# Altium PCB AICat V1.4 双面板 板厚1.6mm.PcbDoc (part 4 of 4)
Units mm, origin at the board's own origin, x right, y up, seen from the top; angles counter-clockwise.
Board outline 152.4 x 101.6 mm, 2 copper layers (Top Layer, Bottom Layer); 106 components, 84 nets, 315 pads, 240 vias.
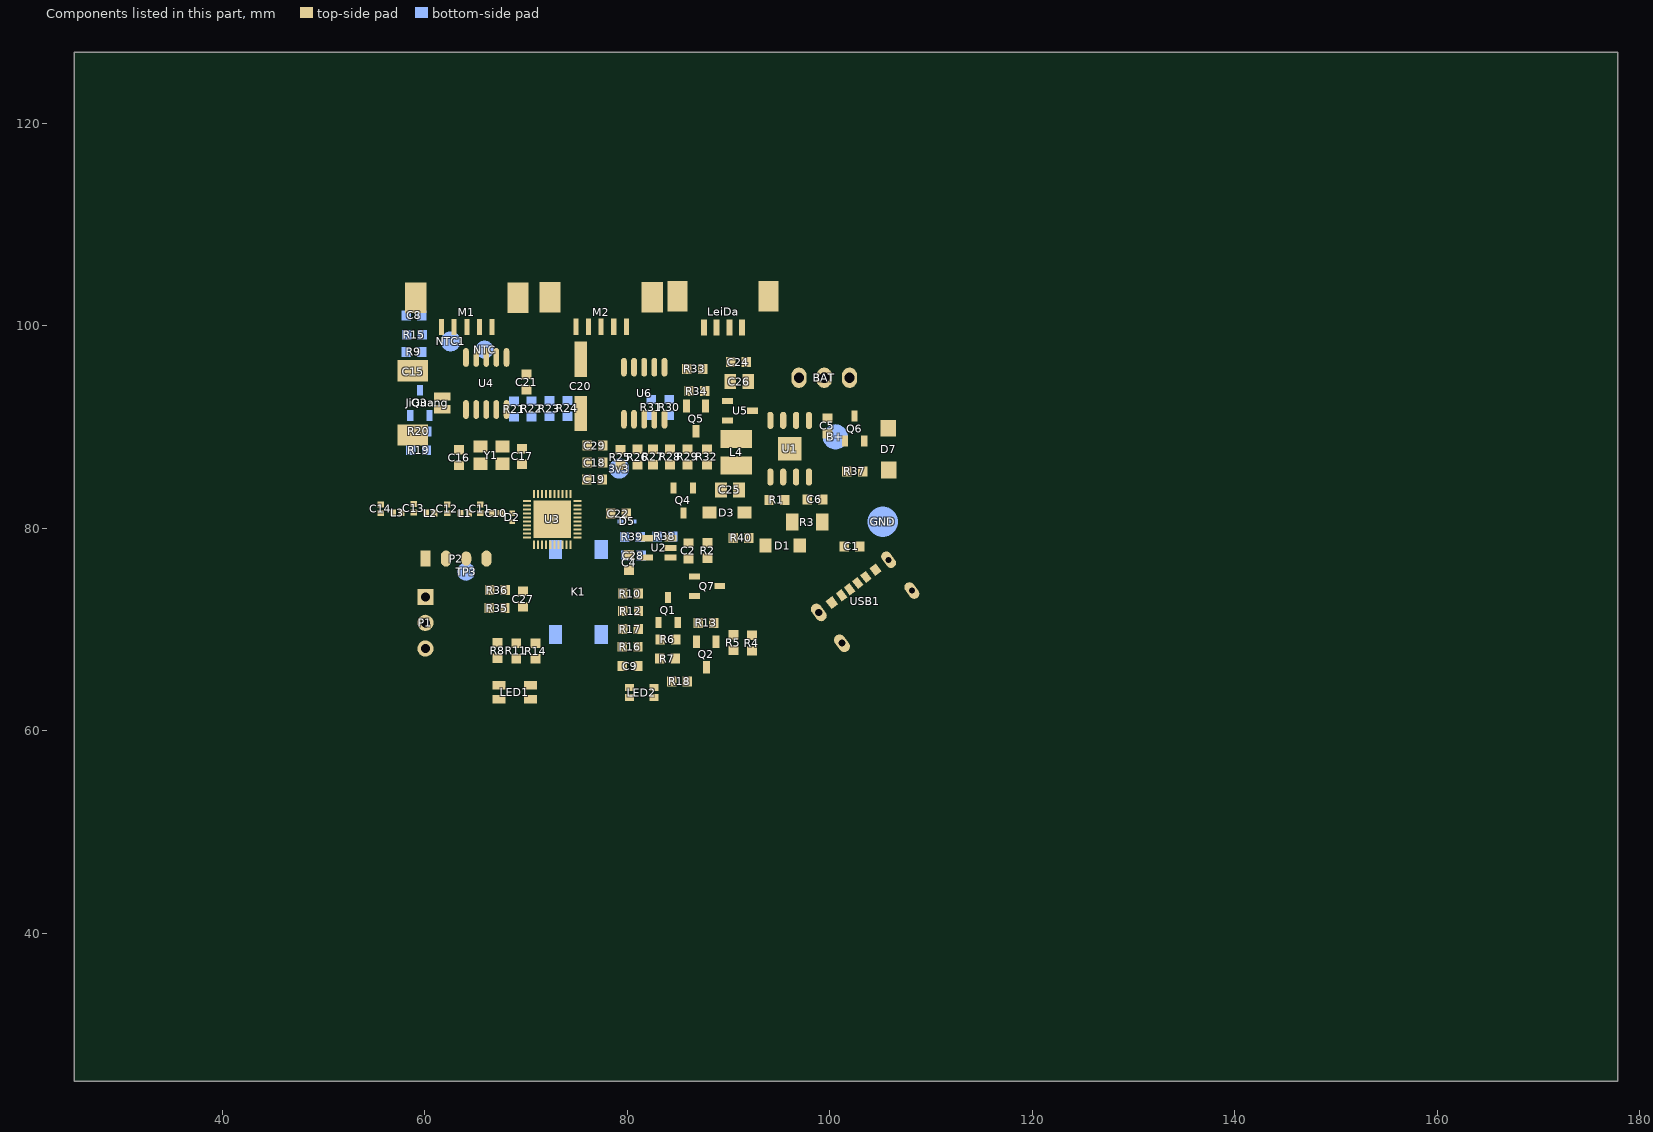
[diagram p4: the components of this part, seen from the top]

## Keep-outs
Keep-Out Layer:
  circle w0.025: c50.201,100.72 r1.35
  circle w0.025: c50.201,72.72 r1.35
  circle w0.025: c100.201,100.72 r1.35
  circle w0.025: c93.201,73.72 r1.35
  circle w0.025: c101.201,81.72 r0.8
  circle w0.025: c96.685,67.72 r0.8
  lines w0.025: 104.205,104.72 46.196,104.72 ; 109.468,76.774 109.468,73.464 104.205,69.3 cw(c82.333,99.73) 103.196,68.599 cw(c82.155,99.995) 101.325,67.423 100.779,67.108 100.372,66.88 100.009,66.682 99.691,66.514 99.421,66.373 99.148,66.234 cw(c80.806,102.479) 97.42,65.41 96.843,65.156 96.391,64.965 95.986,64.799 95.632,64.658 95.302,64.53 94.996,64.414 94.688,64.299 94.349,64.176 93.978,64.045 93.574,63.907 93.136,63.762 92.664,63.611 92.127,63.446 91.523,63.268 90.819,63.072 90.292,62.933 90.073,62.877 89.854,62.822 89.602,62.76 89.349,62.7 89.064,62.633 88.777,62.568 88.457,62.497 88.104,62.421 87.717,62.341 87.263,62.25 86.709,62.146 85.891,62.002 85.2,61.89 85.002,61.86 84.771,61.825 84.54,61.792 84.309,61.759 84.078,61.728 83.813,61.693 83.549,61.659 83.284,61.626 82.987,61.591 82.656,61.554 82.326,61.518 81.964,61.481 81.536,61.44 81.044,61.396 80.358,61.342 79.709,61.297 79.225,61.268 78.807,61.246 78.423,61.227 78.072,61.213 77.753,61.201 77.467,61.191 77.182,61.183 76.929,61.177 76.677,61.171 76.424,61.167 76.204,61.164 75.984,61.161 75.764,61.159 75.576,61.158 75.388,61.157 75.201,61.157 75.013,61.157 74.825,61.158 74.637,61.159 74.417,61.161 74.197,61.164 73.977,61.167 73.725,61.171 73.472,61.177 73.219,61.183 72.934,61.191 72.648,61.201 72.33,61.213 71.978,61.227 71.594,61.246 71.176,61.268 70.692,61.297 70.043,61.342 69.357,61.396 68.865,61.44 68.438,61.481 68.075,61.518 67.745,61.554 67.415,61.591 67.117,61.626 66.853,61.659 66.588,61.693 66.324,61.728 66.092,61.759 65.861,61.792 65.63,61.825 65.399,61.86 65.201,61.89 64.511,62.002 63.692,62.146 63.138,62.25 62.685,62.341 62.297,62.421 61.944,62.497 61.624,62.568 61.337,62.633 61.052,62.7 60.799,62.76 60.548,62.822 60.328,62.877 60.11,62.933 59.583,63.072 58.878,63.268 58.274,63.446 57.737,63.611 57.265,63.762 56.828,63.907 56.424,64.045 56.053,64.176 55.713,64.299 55.405,64.414 55.099,64.53 54.769,64.658 54.415,64.799 54.011,64.965 53.558,65.156 52.981,65.41 cw(c69.596,102.479) 51.253,66.234 50.981,66.373 50.71,66.514 50.393,66.682 50.03,66.88 49.622,67.108 49.077,67.423 cw(c68.246,99.995) 47.205,68.599 cw(c68.068,99.73) 46.196,69.3 46.196,104.72 ; 109.468,76.784 109.468,104.72 46.196,104.72

## Other copper
Top Layer:
  rectangle net VBUS_BAT: 104.724,88.875 106.883,93.37
  rectangle net GND: 77.774,80.438 78.104,80.663
  rectangle net BAT+: 96.114,93.853 97.79,95.936
  rectangle net GND: 89.662,99.035 90.449,104.292
  rectangle net GND: 56.185,94.742 62.103,96.545
  rectangle net GND: 55.096,77.546 56.159,79.811
  rectangle net NetBAT1_2: 98.628,93.777 100.254,95.961
  rectangle net GND: 93.193,86.487 100.381,89.078
  region: 48.038,79.423 48.038,78.923 55.321,78.923 55.321,79.423
  region net NetANT1_1: 55.397,81.273 55.397,81.773 48.117,81.773 48.117,81.273
  region: 48.325,84.117 47.825,84.117 47.825,78.923 48.325,78.923
  region: 51.747,83.617 51.747,84.117 47.83,84.117 47.83,83.617
  region: 51.828,86.416 51.328,86.416 51.328,83.619 51.828,83.619
  region: 51.828,85.944 51.828,86.444 47.848,86.444 47.848,85.944
  region: 48.328,88.737 47.828,88.737 47.828,85.941 48.328,85.941
  region: 51.802,88.26 51.802,88.76 47.827,88.76 47.827,88.26
  region: 51.828,91.056 51.328,91.056 51.328,88.26 51.828,88.26
  region: 51.828,90.587 51.828,91.087 47.817,91.087 47.817,90.587
  region: 48.317,93.416 47.817,93.416 47.817,90.609 48.317,90.609
  region: 48.214,85.941 48.214,86.442 47.827,86.442 47.827,85.941
  region: 53.144,92.916 53.144,93.416 47.817,93.416 47.817,92.916
  rectangle net VBUS_BAT: 60.935,98.527 62.205,102.921
  rectangle net VBUS_BAT: 67.793,95.936 75.514,100.432
  rectangle net VBUS_BAT: 83.414,95.225 84.48,99.974
  rectangle net VCC_USB: 101.015,77.159 101.498,77.826
  rectangle net VBUS_BAT: 82.042,99.416 84.455,100.584
  rectangle net GND: 101.114,93.853 102.79,95.936
  rectangle net GND: 85.141,98.298 86.741,104.419
  rectangle net GND: 85.649,103.937 100.457,104.394
Bottom Layer:
  rectangle net BAT+: 96.088,93.828 97.765,95.961
  rectangle net GND: 101.103,93.878 102.754,95.91
  rectangle net GND: 101.103,93.878 102.754,95.91
  rectangle net NetBAT1_2: 98.603,93.878 100.254,95.91

## Silkscreen, mask and mechanical layers (free items; w line width, h text height)
Top Overlay:
  circle w0.025: c100.152,100.787 r2.75
  circle w0.025: c93.294,73.736 r2.75
  circle w0.508: c78.969,89.383 r0.254
  circle w0.508: c63.271,90.653 r0.254
  circle w0.025: c50.114,100.711 r2.75
  circle w0.025: c50.216,72.695 r2.75
  lines w0.025: 57.821,104.72 57.821,100.72 63.201,100.72 63.201,104.72 ; 64.201,104.72 64.201,100.72 74.201,100.72 74.201,104.72 ; 75.201,104.72 75.201,100.72 83.39,100.72 83.39,104.72 ; 84.201,104.72 84.201,100.72 94.201,100.72 94.201,104.72 ; 97.893,74.845 103.88,66.998 ; 98.079,72.458 102.847,66.209 109.962,71.638 105.194,77.887 ; 102.942,78.696 108.929,70.85 ; 67.201,62.42 70.701,62.42 70.701,65.22 67.201,65.22 67.201,62.42 ; 79.701,62.42 83.201,62.42 83.201,65.22 79.701,65.22 79.701,62.42
  text "B+" at 95.25,97.968 h1.52 r180
  text "+5v" at 91.415,97.866 h0.76
  text "B-" at 101.168,97.739 h1.52 r180
  text "NTC" at 98.501,96.418 h0.76
  text "+" at 62.281,95.021 h0.76 r90
  text "GND" at 61.316,78.74 h0.76
  text "3V3" at 58.598,78.689 h0.76
  text "3V3" at 61.9,73.05 h0.76
  text "SWS" at 61.798,70.409 h0.76
  text "GND" at 61.722,67.615 h0.76
  text "G" at 65.761,62.687 h0.76
Bottom Overlay:
  circle w0.025: c75.201,73.72 r1.75
  lines w0.025: 72.201,70.72 72.201,76.72 78.201,76.72 78.201,70.72 72.201,70.72
  text "B+" at 97.18,96.647 h0.76
  text "B-" at 102.565,96.622 h0.76
  text "NTC" at 100.406,96.52 h0.76
Top Solder:
  lines w0.7: 99.619,73.355 100.152,72.72 ; 100.66,74.041 101.194,73.406 ; 102.997,75.921 103.53,75.286 ; 103.937,76.581 104.47,75.946